# Altium PCB STM32.PcbDoc
Units mil, origin at the board's own origin, x right, y up, seen from the top; angles counter-clockwise.
Board outline 6000 x 4000 mil, 2 copper layers (Top Layer, Bottom Layer); 29 components, 13 nets, 111 pads, 19 vias.
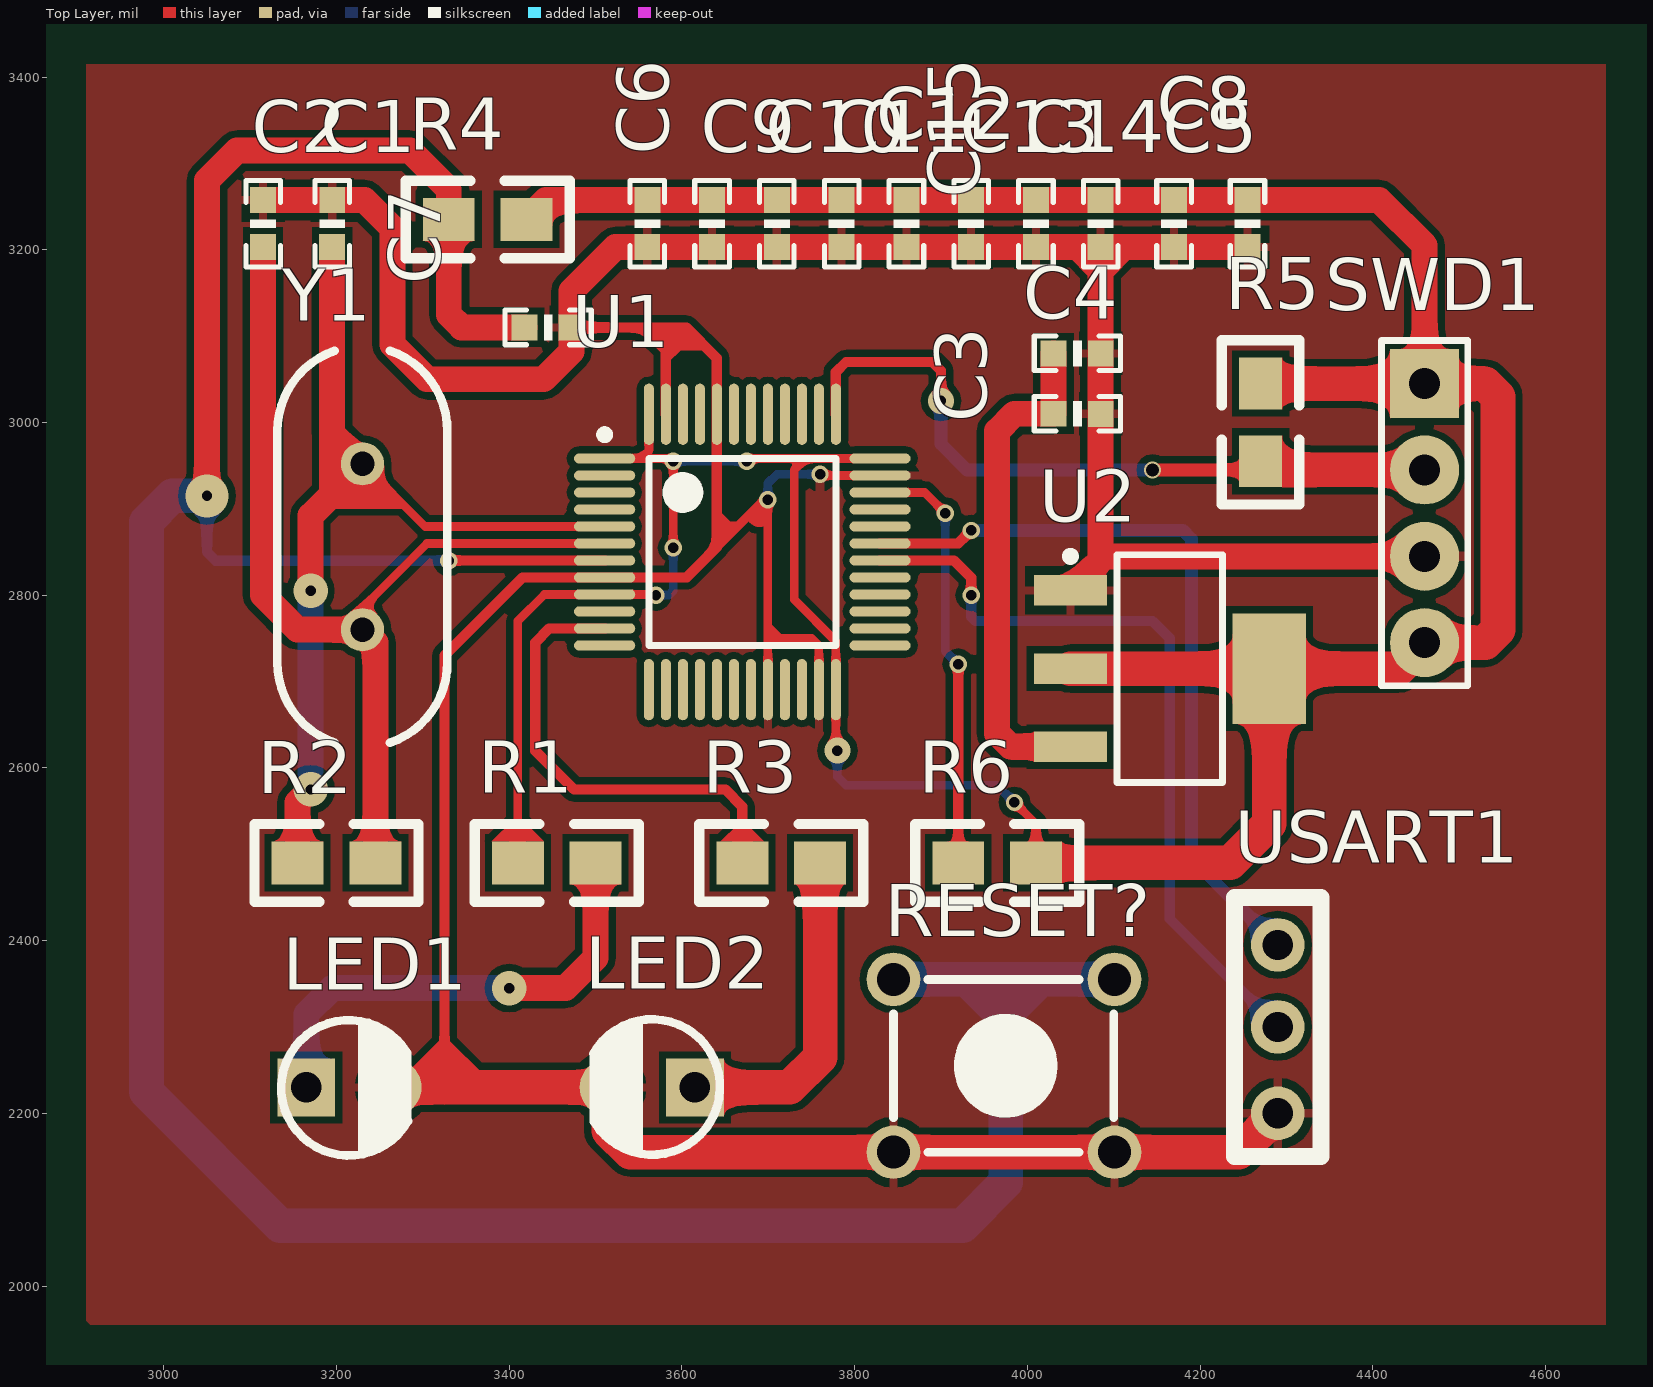
[diagram p0: Top Layer view]
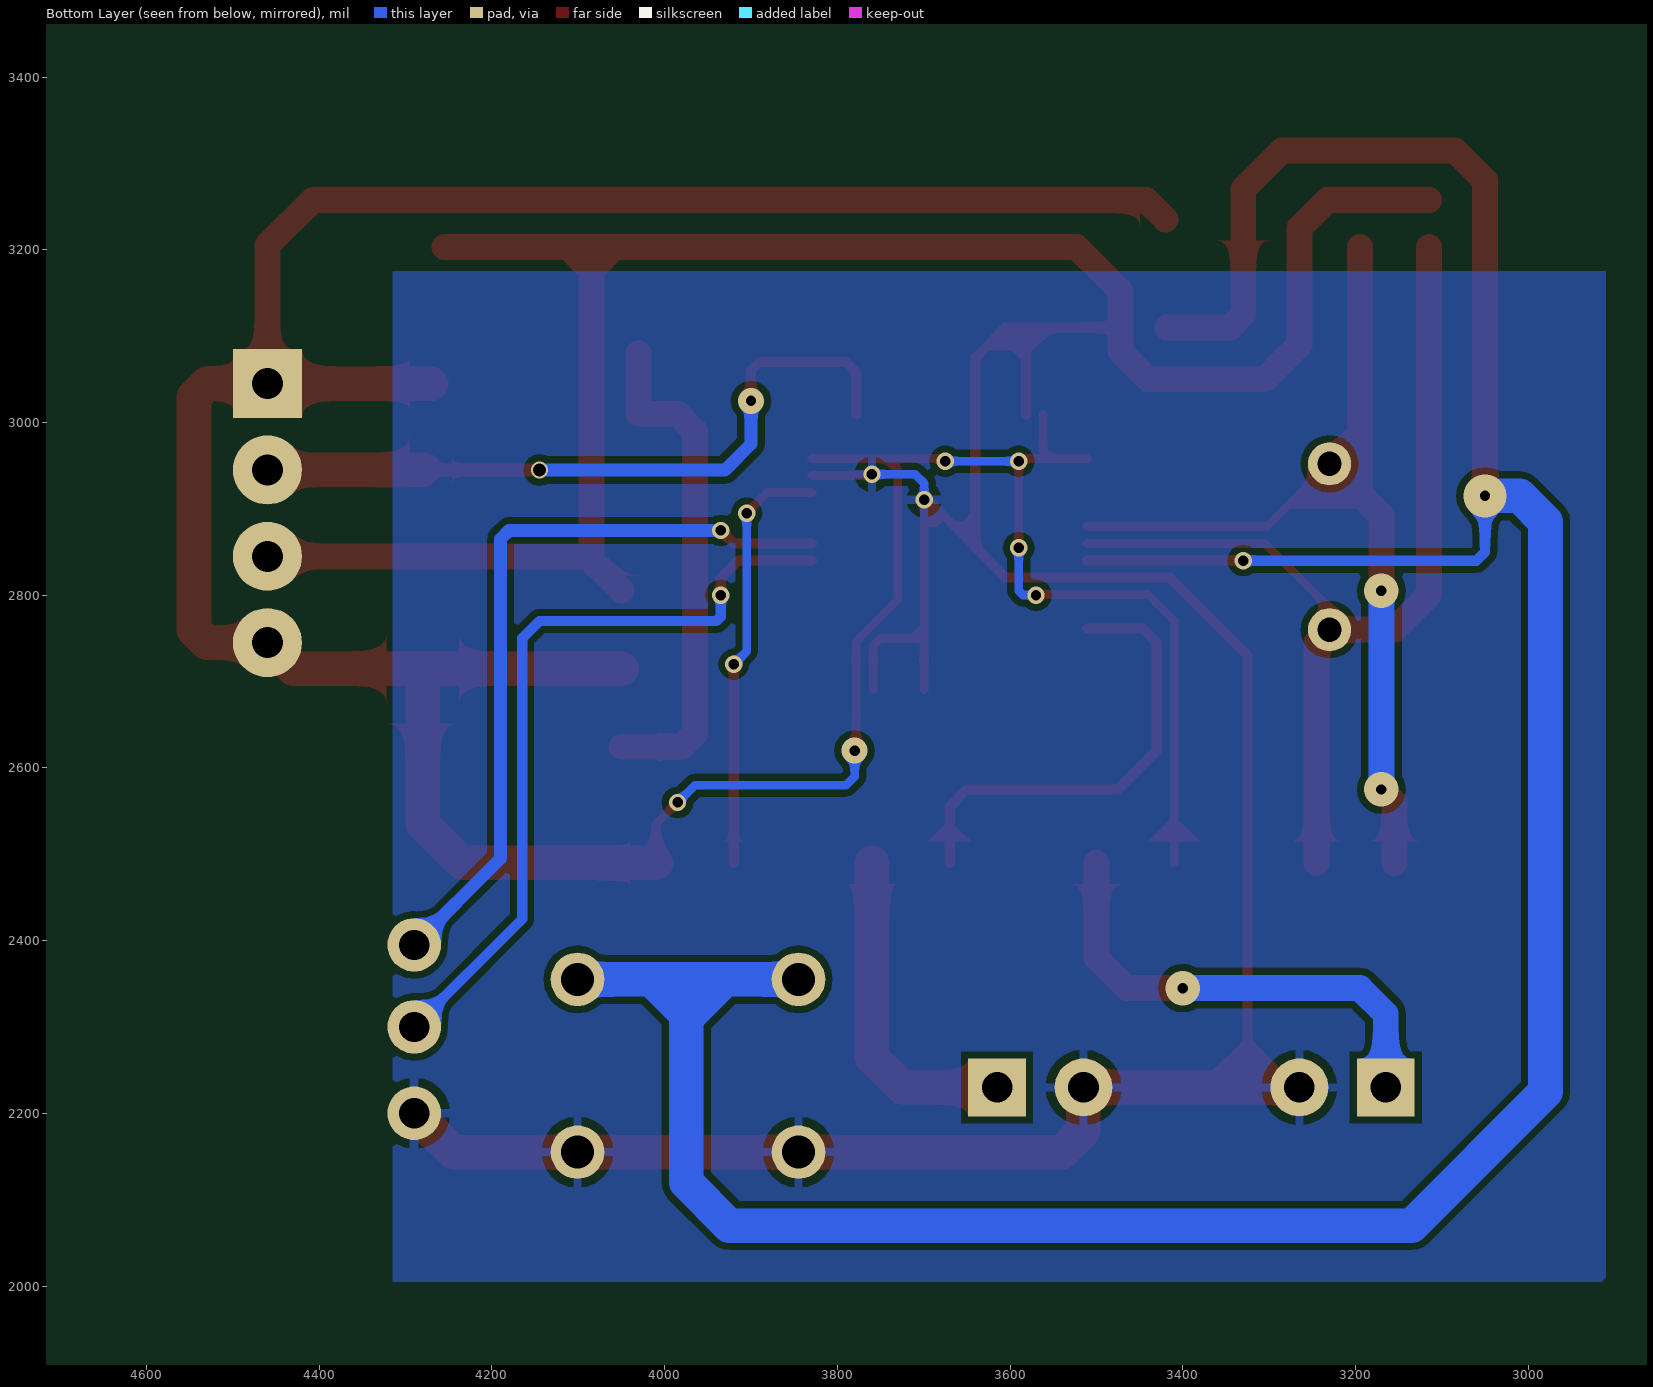
[diagram p1: Bottom Layer view, seen from below]

## Layer stack, top to bottom
Top Solder: solder mask 0.4, Solder Resist, Dk 3.5
Top Layer: signal copper 1.4
Dielectric 1: dielectric 12.6, FR-4, Dk 4.8
Bottom Layer: signal copper 1.4
Bottom Solder: solder mask 0.4, Solder Resist, Dk 3.5

## Board outline
1000,1000 7000,1000 7000,5000 1000,5000

## Design rules (kind name [scope] priority, off if disabled: settings)
Clearance Polygon [InPolygon] p1: gap=8
Clearance [All] p2: gap=2
PolygonConnect [All] p1: connectstyle=Relief reliefconductorwidth=10 reliefentries=4 polygonreliefangle="90 Angle" airgapwidth=10
RoutingVias [All] p1: holewidth=12 width=30 viastyle="Through Hole" minholewidth=10 minwidth=20 maxholewidth=30 maxwidth=50
SolderMaskExpansion [All] p1: expansion=4
Width Width_1 [InNet('GND')] p1: maxlimit=60 minlimit=10 preferedwidth=40
Width [All] p2: maxlimit=60 minlimit=10 preferedwidth=30
30 further rules are at their usual default settings.

## Components (designator, comment, footprint, x,y, rotation, side; value= is the part's Value field where it differs from the comment)
C1 "20pF" 0603P 3195,3230 r90 top
C2 "20pF" 0603P 3115,3230 r90 top
C3 "104" 0603P 4058,3010 r180 top
C4 "104" 0603P 4058,3080 r180 top
C5 "104" 0603P 4169.87,3230 r90 top
C6 "104" 0603P 3559.87,3230 r90 top
C7 "104" 0603P 3445,3110 r180 top
C8 "104" 0603P 4254.87,3230 r90 top
C9 "104" 0603P 3634.87,3230 r90 top
C10 "104" 0603P 3709.87,3230 r90 top
C11 "104" 0603P 3784.87,3230 r90 top
C12 "104" 0603P 3859.87,3230 r90 top
C13 "104" 0603P 3934.87,3230 r90 top
C14 "104" 0603P 4009.87,3230 r90 top
C15 "104" 0603P 4084.87,3230 r90 top
LED1 "红色" "LED 3MM-B" 3215,2230 r0 top
LED2 "红色" "LED 3MM-B" 3565,2230 r180 top
R1 "10k" 0805 3410,2490 r0 top
R2 "1M" 0805 3245,2489.87 r180 top
R3 "10k" 0805 3670,2490 r0 top
R4 "10k" 0805 3420,3235 r180 top
R5 "1M" 0805 4270,2955 r90 top
R6 "1M" 0805 3920,2490 r0 top
RESET? "KEY_M" KEY_M 3845,2355 r0 top
SWD1 "SWD" SDW1 4460,3045 r270 top
U1 "STM32F103C8T6" LQFP48_N 3670,2850 r0 top
U2 "ASM1117" ASM1117 4165,2715 r0 top
USART1 "USART1" PCBComponent_1 4290,2300 r90 top
Y1 "8MHz" XTAL_US 3230,2760 r90 top

## Footprints (in the part's own frame and the unit in brackets; to place one, negate y for a bottom-side part, rotate by r counter-clockwise, add the part's x,y. Pads: shape width x height; smd on the part's side, far side on the other; paste and mask are expansions set on the pad)
0603P [mil]
  rect 30x30 smd: 1(-27,0) 2(27.5,-0.06)
  silkscreen extent -50,-20 50,20
0805 [mil]
  rect 60x50 smd: 1(0,-0.06) 2(90,-0.06)
  silkscreen extent -50,-45 140,45
ASM1117 [mm] "SOT223, 4-Leads, Body 6.50x7.00mm (avg), Pitch 2.30mm, IPC Medium Density"
  rect 2.15x0.9 smd: 1(-2.925,2.3) 2(-2.925,0) 3(-2.925,-2.3)
  rect 2.15x3.25 smd: 2(2.925,0)
  silkscreen extent -3.05,-3.35 1.55,3.42
KEY_M [mil]
  round 62 hole 38: 1(0,0) 1(255.91,0) 2(0,-200) 2(255.91,-200)
  silkscreen extent 0,-200 255,0
"LED 3MM-B" [mm]
  rect 1.7x1.7 hole 0.9: 1(-1.27,0)
  round 1.7 hole 0.9: 2(1.27,0)
  silkscreen extent -2.01,-2 1.72,1.98, body extent -1.95,-1.95 1.64,1.95, height 5.55
LQFP48_N [mm] "Thin QFP, 48-Leads, Body 7x7mm, Pitch 0.5mm, IPC Medium Density"
  oval 1.8x0.3 smd: 1(-4.05,2.75) 2(-4.05,2.25) 3(-4.05,1.75) 4(-4.05,1.25) 5(-4.05,0.75) 6(-4.05,0.25) 7(-4.05,-0.25) 8(-4.05,-0.75) 9(-4.05,-1.25) 10(-4.05,-1.75) 11(-4.05,-2.25) 12(-4.05,-2.75) 25(4.05,-2.75) 26(4.05,-2.25) 27(4.05,-1.75) 28(4.05,-1.25) 29(4.05,-0.75) 30(4.05,-0.25) 31(4.05,0.25) 32(4.05,0.75) 33(4.05,1.25) 34(4.05,1.75) 35(4.05,2.25) 36(4.05,2.75)
  oval 0.3x1.8 smd: 13(-2.75,-4.05) 14(-2.25,-4.05) 15(-1.75,-4.05) 16(-1.25,-4.05) 17(-0.75,-4.05) 18(-0.25,-4.05) 19(0.25,-4.05) 20(0.75,-4.05) 21(1.25,-4.05) 22(1.75,-4.05) 23(2.25,-4.05) 24(2.75,-4.05) 37(2.75,4.05) 38(2.25,4.05) 39(1.75,4.05) 40(1.25,4.05) 41(0.75,4.05) 42(0.25,4.05) 43(-0.25,4.05) 44(-0.75,4.05) 45(-1.25,4.05) 46(-1.75,4.05) 47(-2.25,4.05) 48(-2.75,4.05)
  silkscreen extent -4.17,-2.75 2.75,3.57, body extent -3.5,-3.5 3.5,3.5, height 1.6
PCBComponent_1 [mil]
  round 62 hole 35: 1(-100,0) 2(0,0) 3(95,0)
  silkscreen extent -150,-50 150,50
SDW1 [mil] "Header4"
  rect 80x80 hole 36: 1(0,0)
  round 80 hole 36: 2(100,0) 3(200,0) 4(300,0)
  silkscreen extent -50,-50 350,50, body extent -50,-50 350,50, height 335
XTAL_US [mil]
  round 50 hole 28: 1(0,0) 2(192.13,0)
  silkscreen extent -131,-98 323,98

## Part data
C1 C2 C3 C4 C5 C6 C7 C8 C9 C10 C11 C12 C13 C14 C15: library part C
LED1 LED2: library part LED-3MM, "插件LED"
R1 R2 R3 R4 R5 R6: library part R
Y1: library part XTAL, "Crystal Oscillator"

## Via types
v1: diameter 20, hole 12, Top Layer to Bottom Layer, 12 vias
v2: diameter 40, hole 12, Top Layer to Bottom Layer, 3 vias
v3: diameter 30, hole 12, Top Layer to Bottom Layer, 2 vias
v4: diameter 20, hole 15, Top Layer to Bottom Layer, 1 vias
v5: diameter 50, hole 12, Top Layer to Bottom Layer, 1 vias

## Nets (pads, with @x,y where several pads share a name; then routed paths per layer and width w, separated by ;. In a path a pad name is that pad's centre, name@x,y a point inside that pad or via, vN(x,y) a via of type N, cw(c..) or ccw(c..) an arc to the next point about the centre after c; other vN are vias at no path point)
GND: C1.2 C2.2 C3.1 C4.1 C5.1 C6.1 C7.1 C8.1 C9.1 C10.1 C11.1 C12.1 C13.1 C14.1 C15.1 LED1.2 LED2.2 RESET?.2 SWD1.3 U1.8 U1.20 U1.23 U1.35 U1.44 U1.47 U2.1 USART1.1 | length 5272.3
  Top Layer w10: 3640.47,2855.47 3695.47,2910.47 v1(3699.53,2910.47) 3699.53,2744.53 ; 3680,2890 ccw(c3690,2895) 3695,2885 ; U1.20 3699.53,2744.53 ; U1.23 3758.58,2741.42 3750,2750 3705,2750 3699.53,2744.53 ; v1(3760,2940) 3761.42,2938.58 U1.35
  Top Layer w12: 3325,2230 3325,2730 3415.47,2820.47 U1.8 3605.47,2820.47 3640.47,2855.47 U1.44 3640.47,3074.53 3605,3110 3555,3110 ; C7.1 3555,3110 ; U1.47 3581.42,3083.58 3555,3110
  Top Layer w30: C2.2 C1.2 3232.5,3257.5 3265,3225 3265,3090 3305,3050 3440,3050 3472,3082 C7.1 3472,3152 3523,3203 C6.1 C9.1 C10.1 C11.1 C12.1 C13.1 C14.1 C15.1 ; U2.1 4084.87,2840.58 ; C8.1 C5.1 C15.1 ; SWD1.3 4089.29,2845 4084.87,2840.58 ; 4084.87,2840.58 C15.1
  Top Layer w40: LED1.2 3325,2230 LED2.2 3515,2180 3540,2155 3845,2155 4100.91,2155 4245,2155 USART1.1
  Bottom Layer w10: v1(3699.53,2910.47) 3699.53,2929.53 3710,2940 v1(3760,2940)
LED: R3.1 U1.11 | length 544.3
  Top Layer w12: U1.11 3446.42,2761.42 3430,2745 3430,2620 3475,2575 3650,2575 3670,2555 R3.1
NetLED1_1: LED1.1 R1.2 | length 556.9
  Top Layer w30: v2(3400,2345) 3465,2345 3500,2380 R1.2
  Bottom Layer w30: LED1.1 3165,2315 3195,2345 v2(3400,2345)
NetLED2_1: LED2.1 R3.2 | length 384.4
  Top Layer w40: LED2.1 3725,2230 3760,2265 R3.2
NRST: C7.2 R4.2 RESET?.1 U1.7 | length 3750.2
  Top Layer w12: v1(3330,2840) 3330.16,2840.16 U1.7
  Top Layer w30: v5(3050,2915) 3050,3280 3085,3315 3285,3315 3330,3270 R4.2 3330,3125 3344.94,3110.06 C7.2
  Bottom Layer w12: v5(3050,2915) 3050,2850 3060,2840 v1(3330,2840)
  Bottom Layer w40: v5(3050,2915) 3010,2915 2980,2885 2980,2225 3135,2070 3925,2070 3975,2120 3975,2310 3930,2355 RESET?.1@3845,2355 ; 3975,2314.55 4015.45,2355 RESET?.1@4100.91,2355
OSC_IN: C1.1 R2.2 U1.5 Y1.2 | length 1069.2
  Top Layer w10: Y1.2 3302.6,2879.53 U1.5
  Top Layer w30: R2.2 3155,2560 v2(3170,2575) ; v2(3170,2805) 3170,2892.13 Y1.2 3195,2987.13 C1.1
  Bottom Layer w30: v2(3170,2575) v2(3170,2805)
OSC_OUT: C2.1 R2.1 U1.6 Y1.1 | length 1147.4
  Top Layer w10: Y1.1 3230,2785 3304.84,2859.84 U1.6
  Top Layer w30: C2.1 3115,2800 3155,2760 Y1.1 3245,2745 R2.1
RX1: U1.31 USART1.3 | length 882.4
  Top Layer w12: U1.31 3919.84,2859.84 v1(3935,2875)
  Bottom Layer w15: v1(3935,2875) 4180,2875 4190,2865 4190,2495 USART1.3
SWCLK: R5.1 SWD1.2 U1.37 | length 831.1
  Top Layer w12: U1.37 3778.27,3058.27 3790,3070 3890,3070 3900,3060 v3(3900,3025)
  Top Layer w15: v4(4145,2945) 4260.06,2945 R5.1
  Top Layer w40: R5.1@4280.06,2945 SWD1.2
  Bottom Layer w15: v3(3900,3025) 3900,2975 3930,2945 v4(4145,2945)
SWDIO: R6.1 U1.34 | length 496.7
  Top Layer w10: U1.34 3881.1,2918.9 v1(3905,2895)
  Top Layer w12: R6.1 v1(3920,2720)
  Bottom Layer w10: v1(3905,2895) 3905,2735 v1(3920,2720)
TX1: U1.30 USART1.2 | length 901
  Top Layer w12: U1.30 3914.84,2840.16 3935,2820 v1(3935,2800)
  Bottom Layer w12: v1(3935,2800) 3935,2775 3940,2770 4145,2770 4165,2750 4165,2425 USART1.2
VCC3.3: C5.2 C6.2 C8.2 C9.2 C10.2 C11.2 C12.2 C13.2 C14.2 C15.2 R1.1 R4.1 R5.2 R6.2 SWD1.1 SWD1.4 U1.1 U1.9 U1.24 U1.36 U1.48 U2.2 | length 4458.5
  Top Layer w10: R1.1 3410,2770 3440.79,2800.79 U1.9 3569.21,2800.79 v1(3570,2800) ; U1.1 3553.27,2958.27 ; U1.48 3561.73,2966.73 3553.27,2958.27 ; v1(3590,2855) v1(3590,2955) 3586.73,2958.27 3553.27,2958.27 ; v1(3675,2955) 3678.27,2958.27 3743.27,2958.27 ; v3(3780,2620) 3778.27,2621.73 U1.24 3778.27,2746.73 3730,2795 3730,2945 3743.27,2958.27 ; U1.36 3743.27,2958.27 ; v1(3985,2560) 4010,2535 R6.2
  Top Layer w30: R4.1 3442.44,3257.5 C6.2 C9.2 C10.2 C11.2 C12.2 C13.2 C14.2 C15.2 C5.2 C8.2 4407.5,3257.5 4460,3205 SWD1.1
  Top Layer w40: R6.2 4234.94,2489.94 4280.16,2535.16 U2.2@4280.16,2715 ; U2.2@4049.84,2715 U2.2@4280.16,2715 ; R5.2 SWD1.1 4530,3045 4545,3030 4545,2760 4530,2745 SWD1.4 4430,2715 U2.2@4280.16,2715
  Bottom Layer w10: v1(3570,2800) 3585,2800 3590,2805 v1(3590,2855) ; v1(3590,2955) v1(3675,2955) ; v3(3780,2620) 3780,2590 3790,2580 3965,2580 v1(3985,2560)
VCC_IN: C3.2 C4.2 U2.3 | length 585.1
  Top Layer w30: C4.2 C3.2 3985.06,3010.06 3965,2990 3965,2640 3980.55,2624.45 U2.3
pads on no net: U1.2 U1.3 U1.4 U1.10 U1.12 U1.13 U1.14 U1.15 U1.16 U1.17 U1.18 U1.19 U1.21 U1.22 U1.25 U1.26 U1.27 U1.28 U1.29 U1.32 U1.33 U1.38 U1.39 U1.40 U1.41 U1.42 U1.43 U1.45 U1.46

## Polygon pours and split planes (outlines as drawn)
GND on Top Layer "Top Layer-No Net" (solid, pour order 10): 2910,3415 4670,3415 4670,1955 2915,1955 2910,1960 2910,3420
GND on Bottom Layer "Top Layer-No Net" (solid, pour order 12): 2910,3175 4315,3175 4315,2005 2915,2005 2910,2010 2910,3170

## Other copper
Top Layer:
  region net GND: 3700,2770 3715,2755 3700,2755 3699.53,2755.47 3699.53,2770
  region net GND: 3680,2890 3690,2880 3695,2880 3695,2900.51 3693.4,2902.12
  region net GND: 3645,2900 3645,2895.97 3655.97,2885 3645.47,2885 3645.47,2899.53
  region: 3640.47,2890 3645.47,2885
  region: 3640.47,2890 3645.47,2885
  region net GND: 3640.47,2890 3645.47,2885 3666.46,2885 3647.01,2865.54
  region net GND: 3325,2290 3375,2240 3290,2240 3282.5,2247.5
  region net GND: 3581.42,3083.58 3628.58,3083.58 3630,3085 3610,3105 3560,3105
  region net GND: 3585,3070 3598.58,3083.58 3581.42,3083.58
  region net GND: 4100,3170 4120,3190 4100,3190
  region net GND: 4070,3170 4050,3190 4070,3190
  region net VCC3.3: 3410,2540 3405,2540 3380,2515
  region net VCC3.3: 3380,2515 3405,2540 3407.5,2540 3407.5,2517.5 3410,2515
  region net VCC3.3: 3440,2515 3415,2540 3410,2535 3410,2515
  region net OSC_IN: 3180,2985 3180,2920 3210,2950 3210,2955
  region net OSC_IN: 3194.17,2900 3275,2900 3230.91,2944.09
  region net LED: 3665,2535 3645,2515 3665,2515
  region net LED: 3675,2535 3695,2515 3675,2515
Bottom Layer:
  region net NRST: 4020,2375 3970,2325 3920,2375